# Altium PCB STM32L496RG_Breakout.PcbDoc
Units mil, origin at the board's own origin, x right, y up, seen from the top; angles counter-clockwise.
Board outline 2775 x 2320 mil, 4 copper layers (Top Layer, GND1, GND2, Bottom Layer), stack 23.756 mil thick; 57 components, 36 nets, 200 pads, 50 vias.
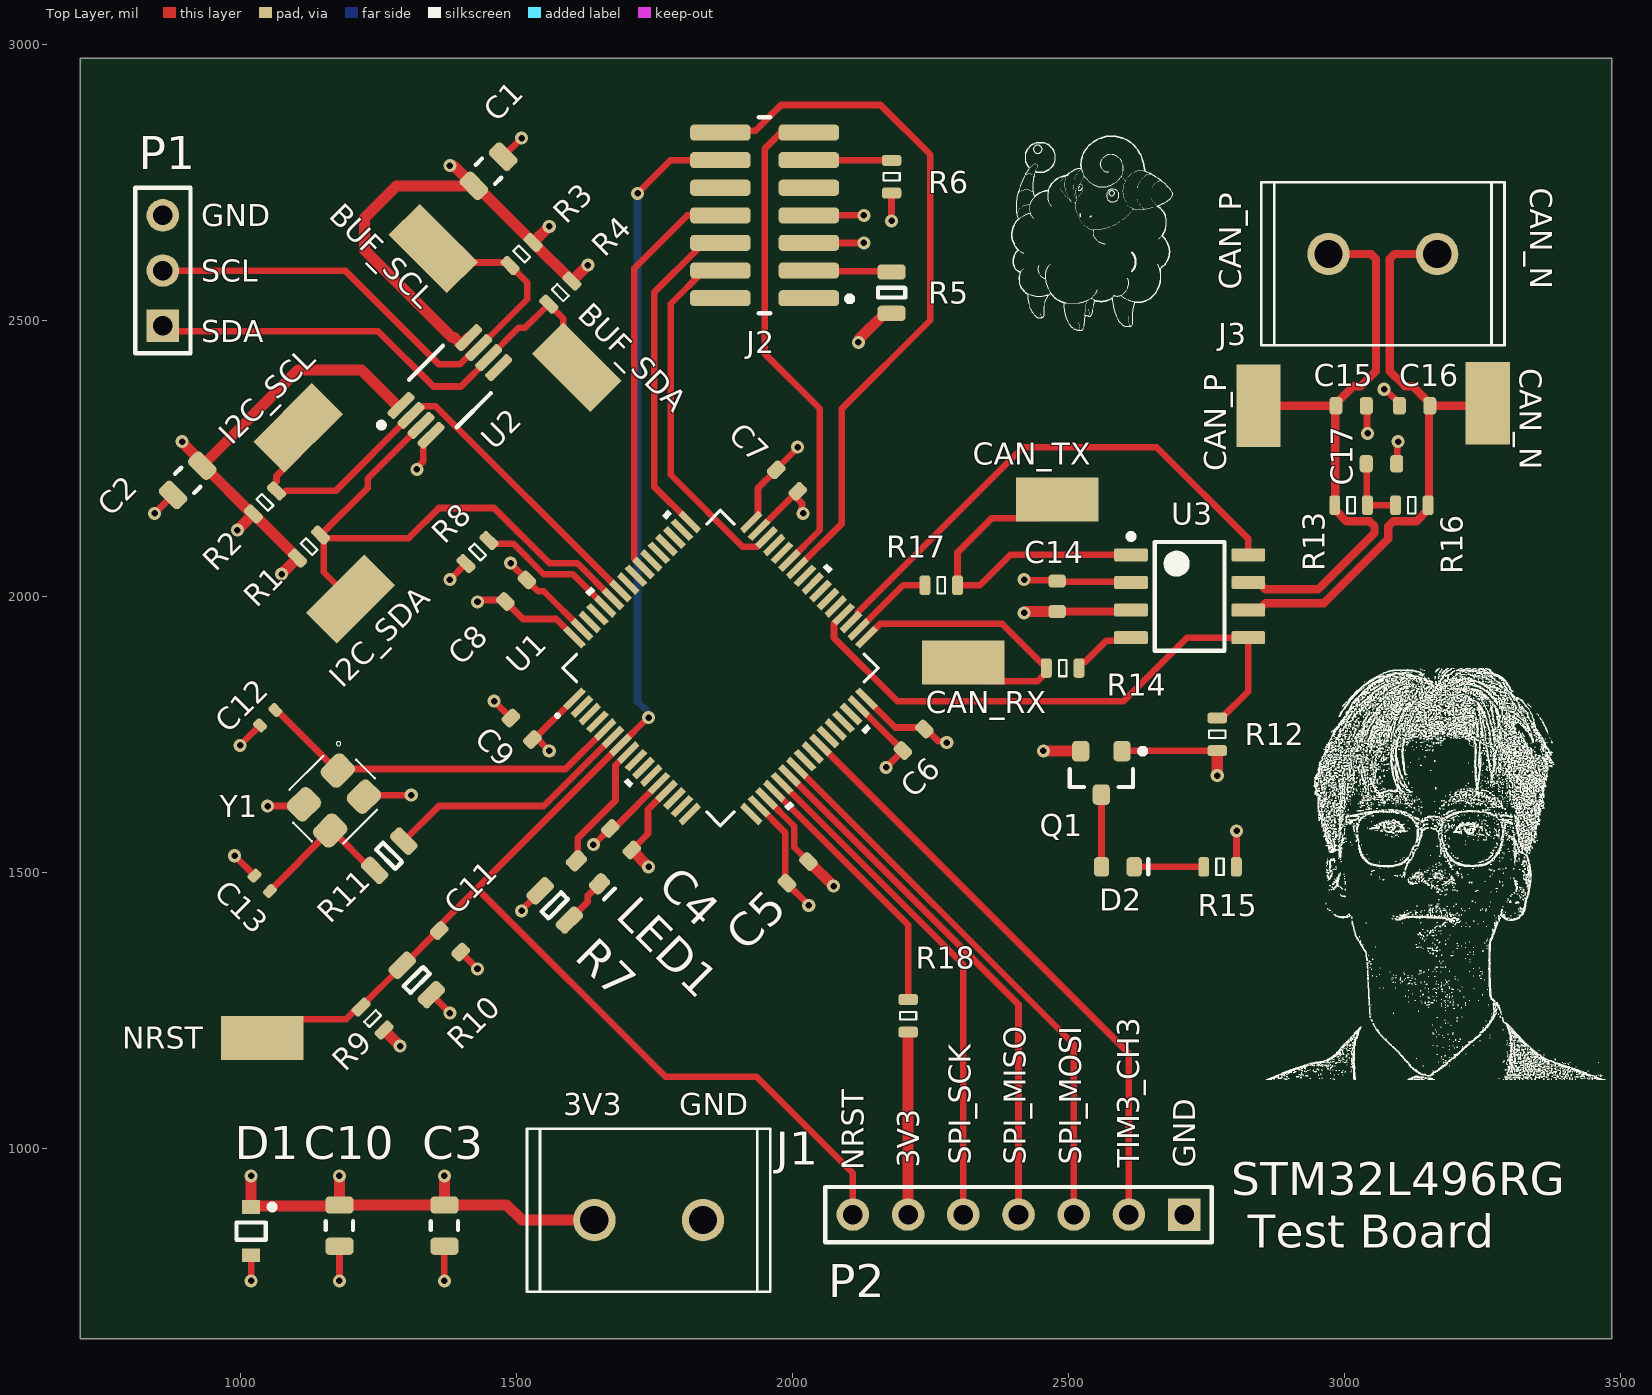
[diagram p0: Top Layer view]
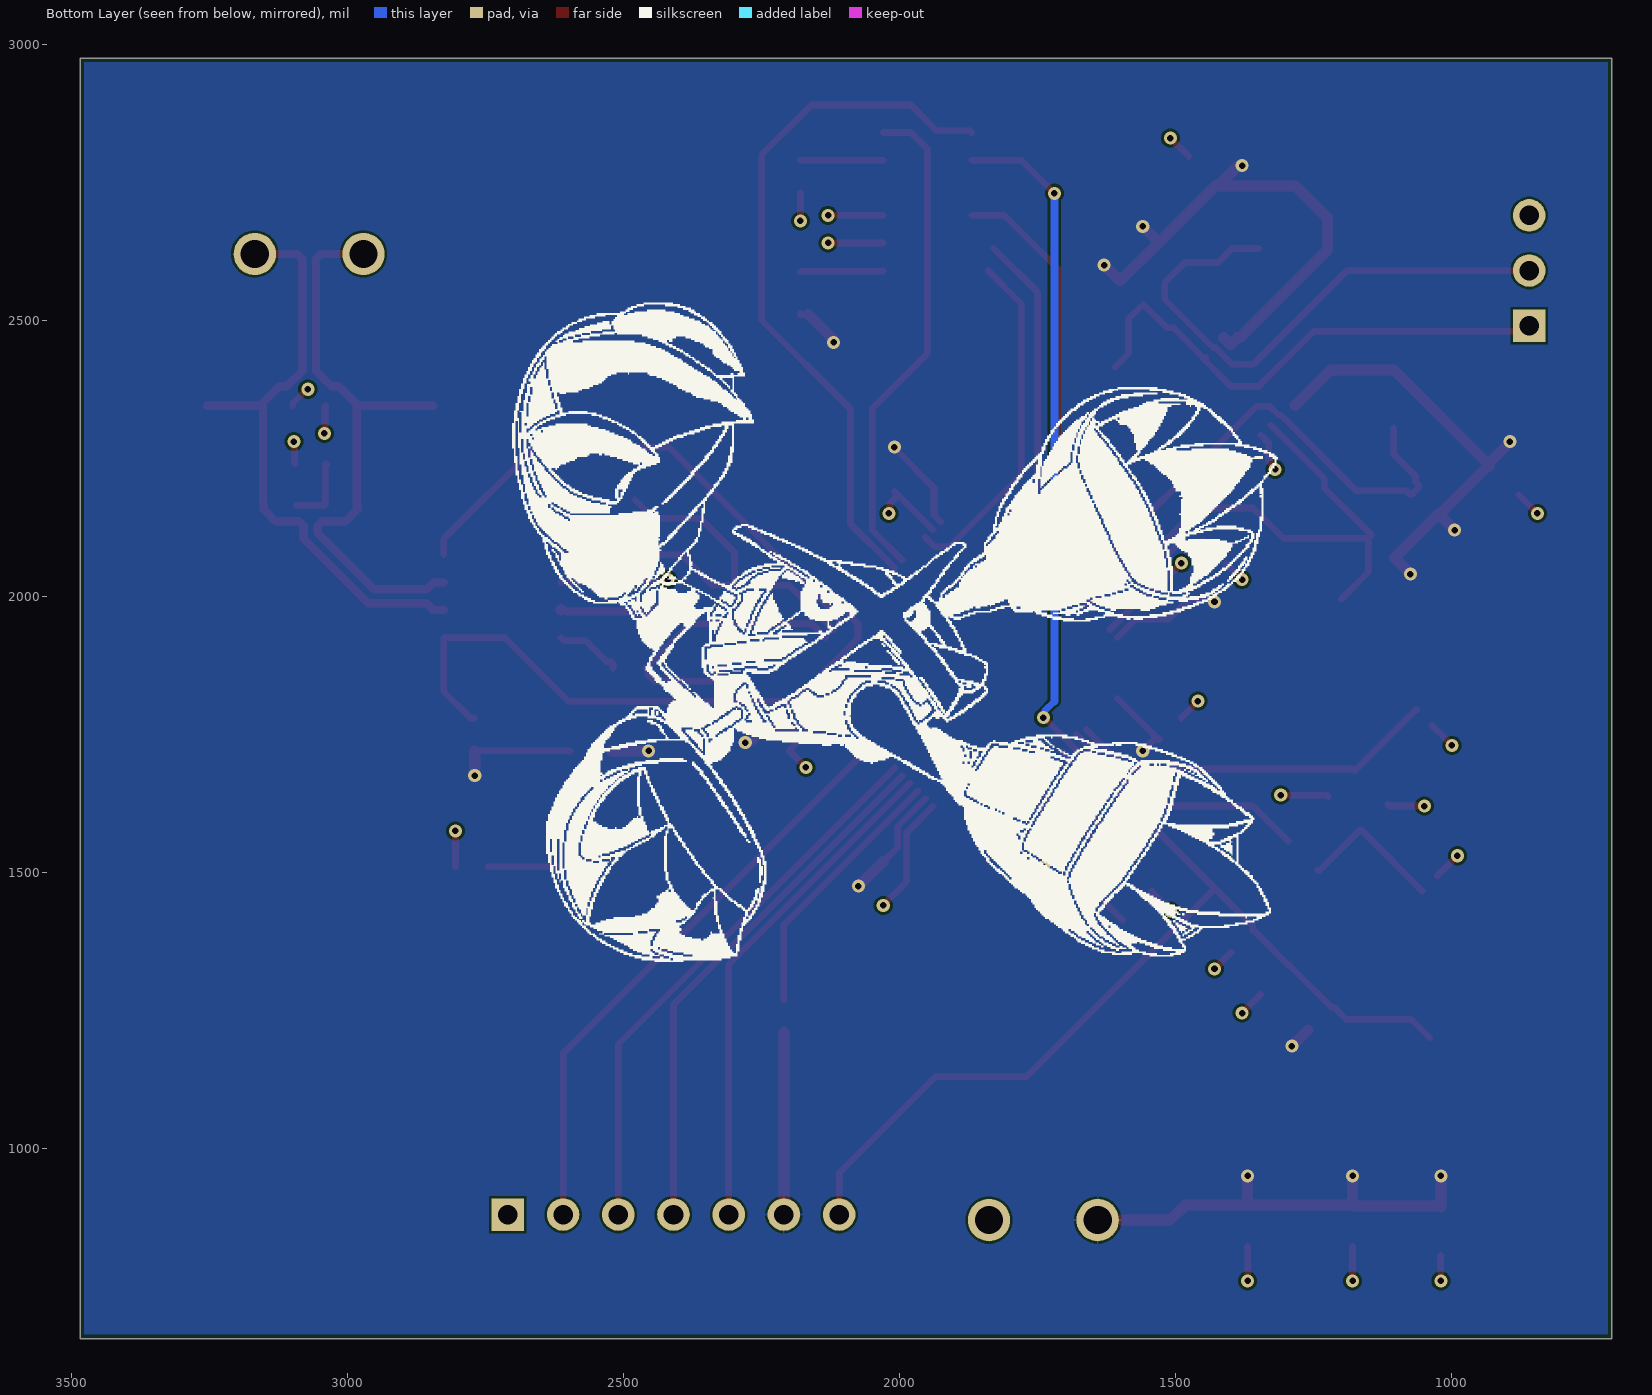
[diagram p1: Bottom Layer view, seen from below]
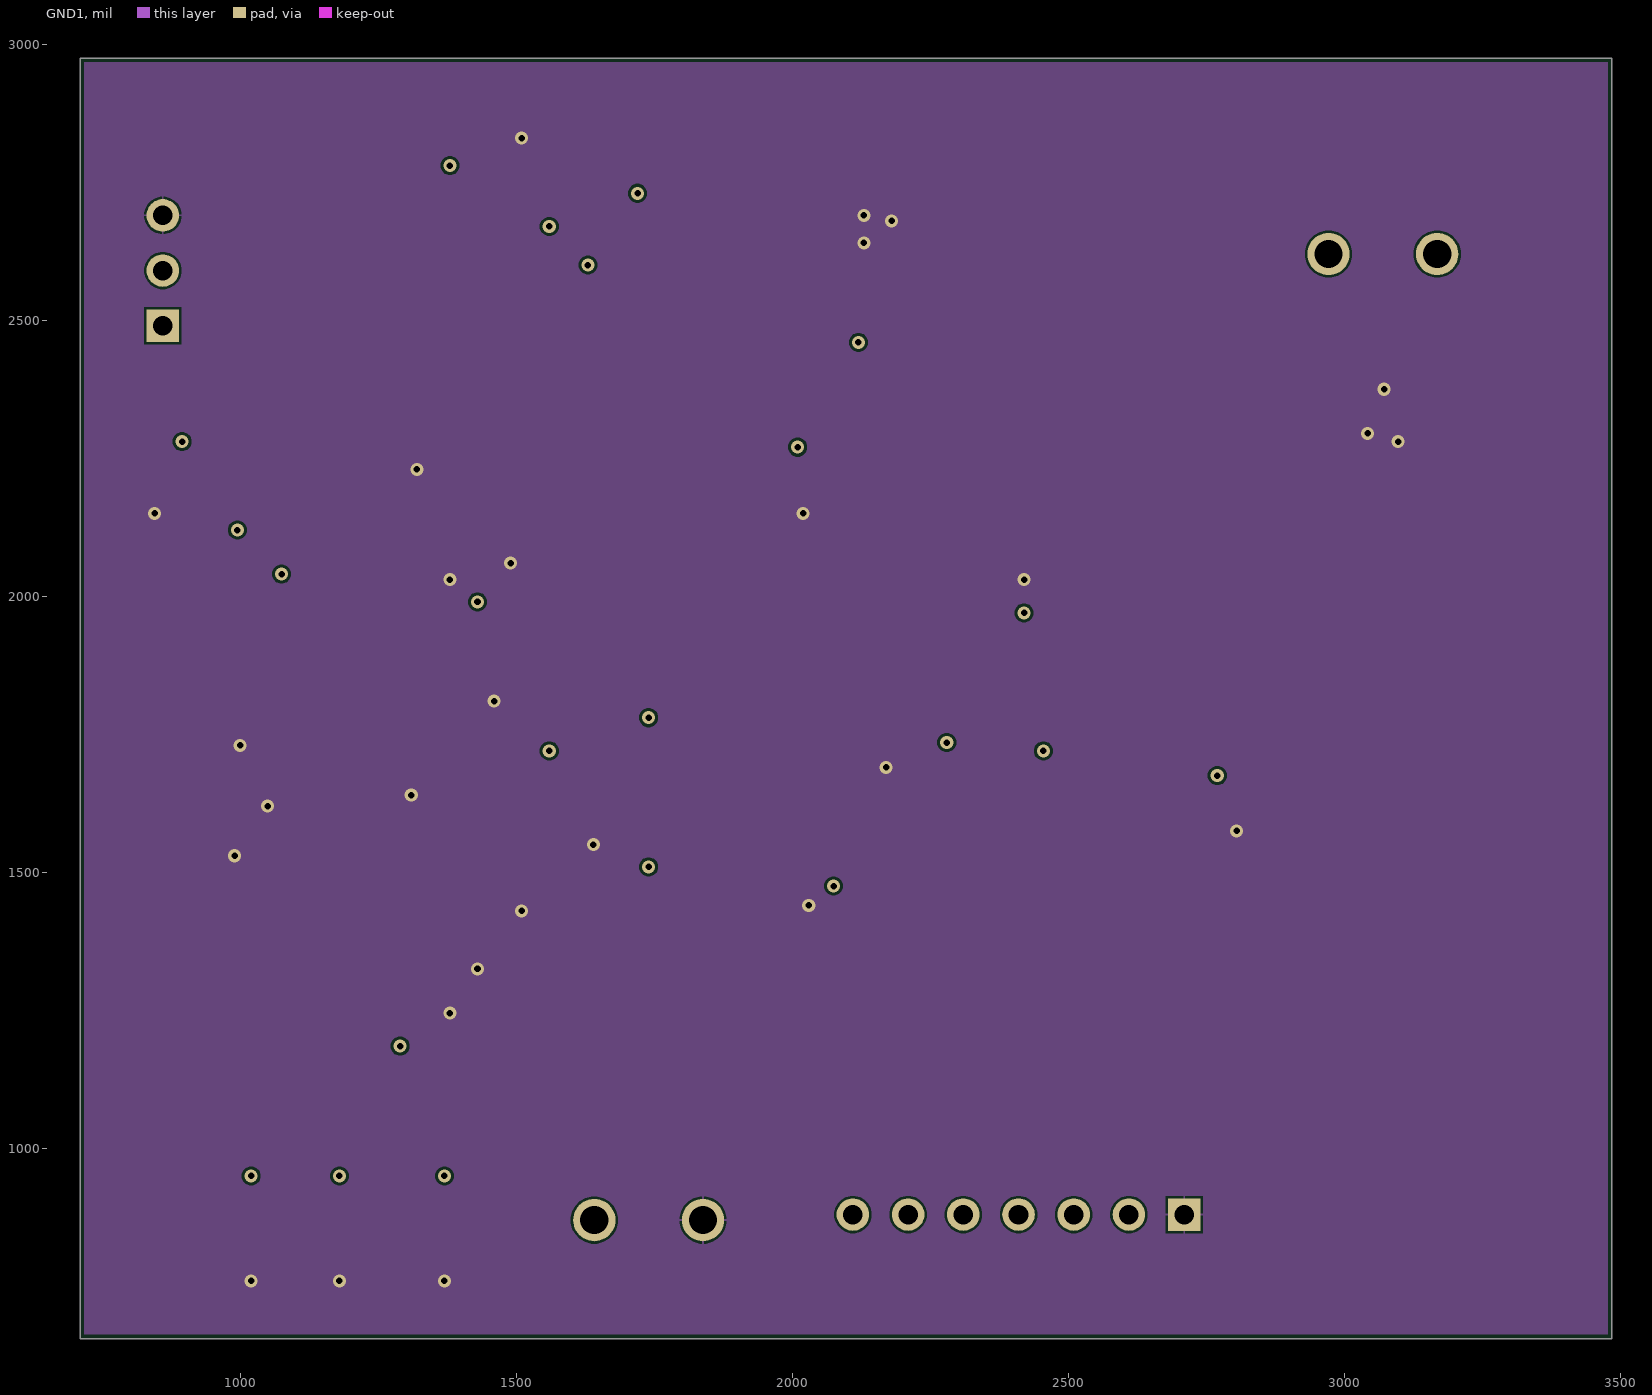
[diagram p2: GND1]
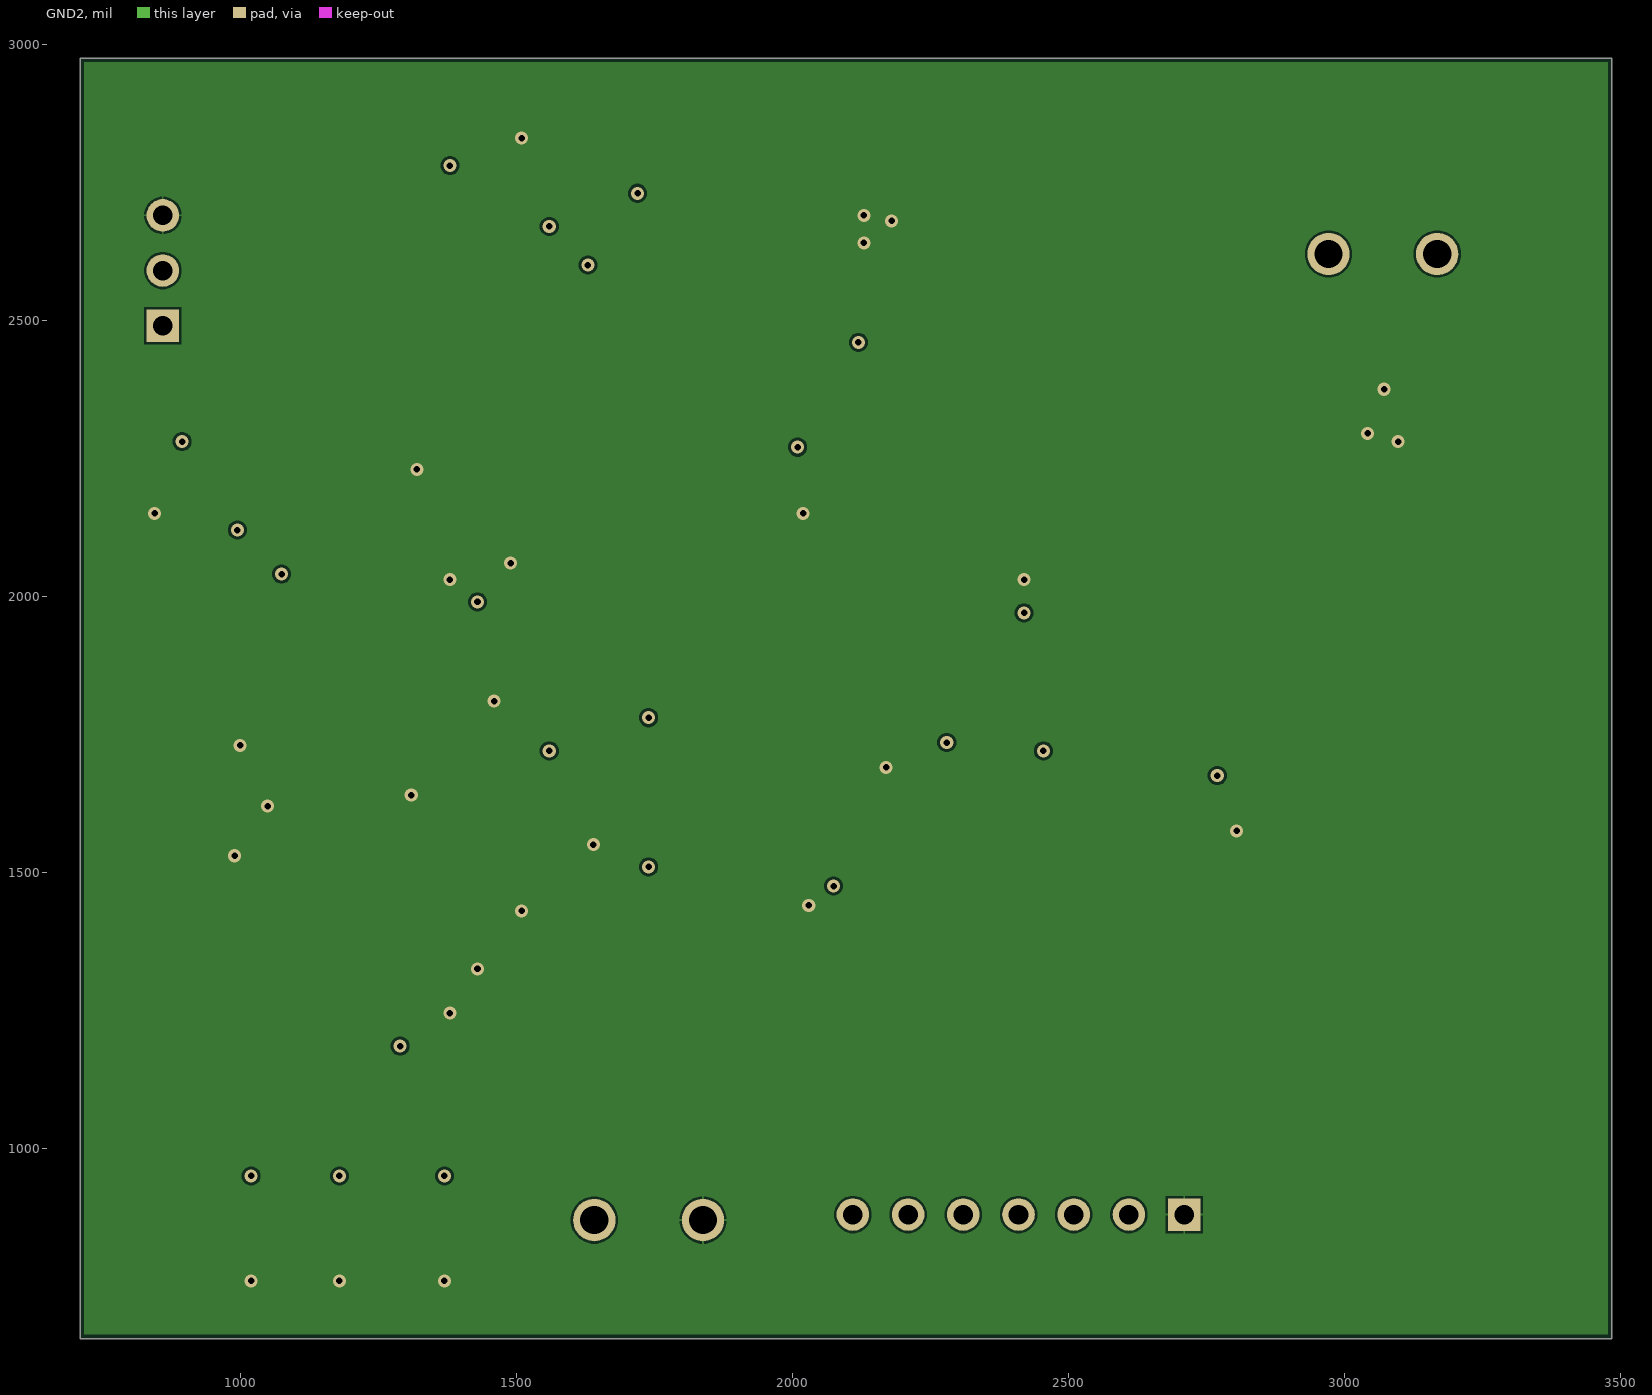
[diagram p3: GND2]
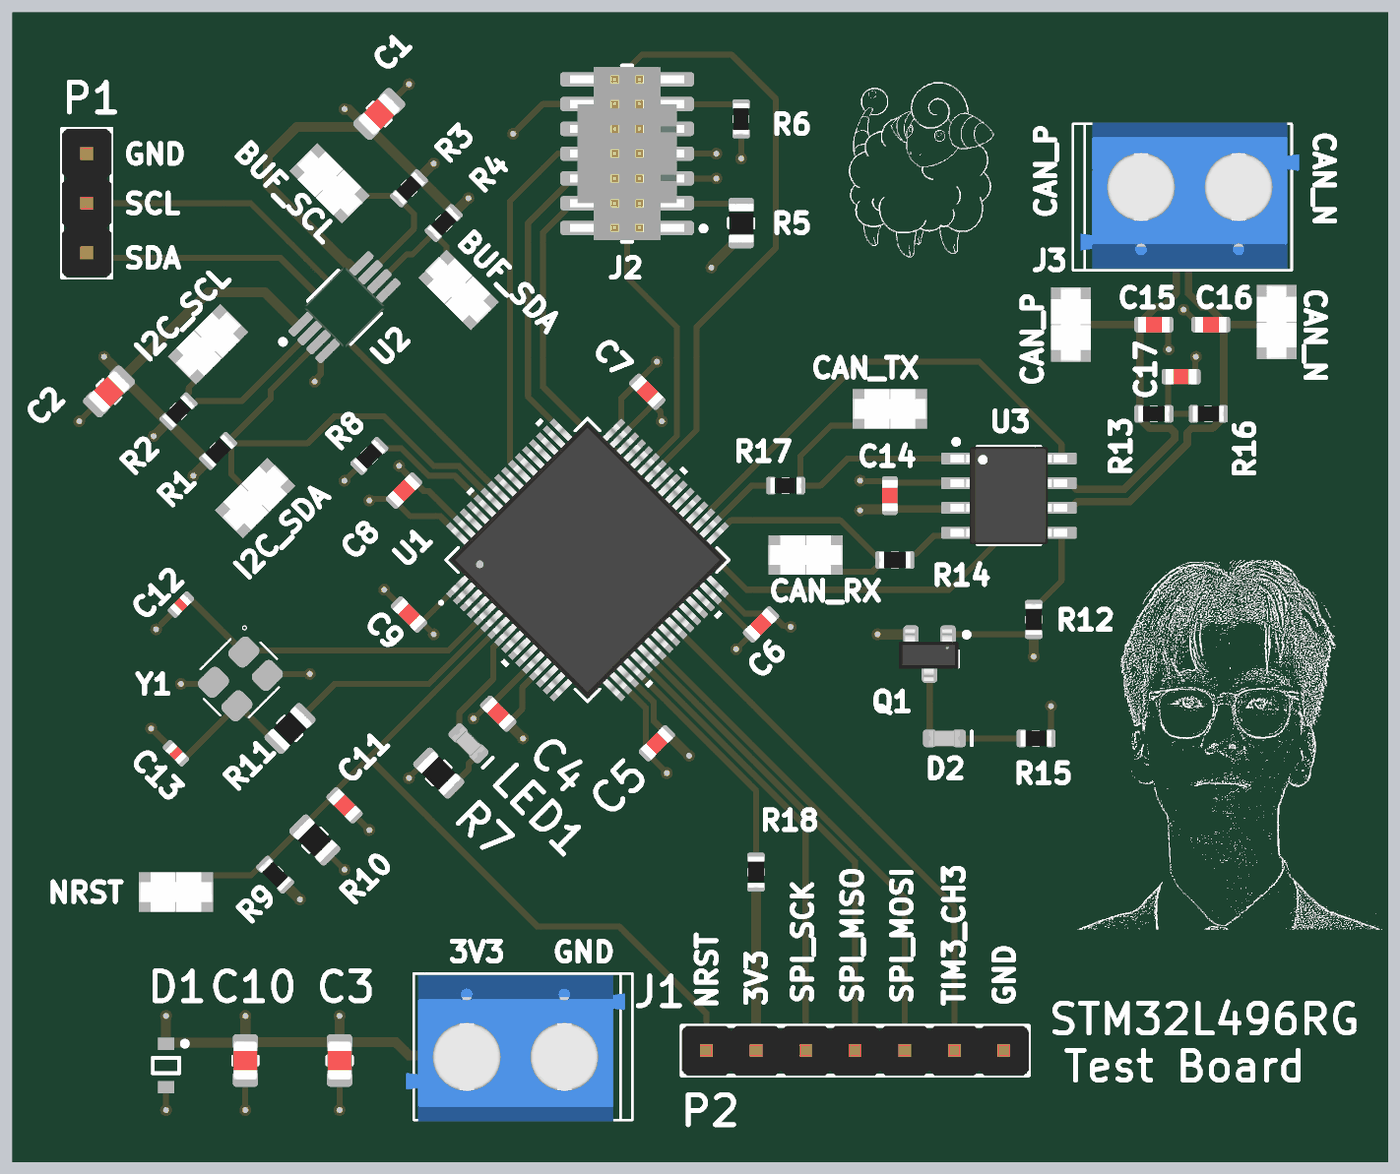
[diagram p4: 3D render of the assembled board from above, using the file's embedded part models]

## Layer stack, top to bottom
Top Solder: solder mask 0.4, Solder Resist, Dk 3.5
Top Layer: signal copper 1.4
Dielectric 2: prepreg 2.8, PP-006, Dk 4.1
GND1: signal copper 1.378
Dielectric 1: dielectric 12.6, FR-4, Dk 4.8
GND2: signal copper 1.378
Dielectric 3: prepreg 2.8, PP-006, Dk 4.1
Bottom Layer: signal copper 1.4
Bottom Solder: solder mask 0.4, Solder Resist, Dk 3.5

## Board outline
710,655 710,2975 3485,2975 3485,655

## Design rules (kind name [scope] priority, off if disabled: settings)
BoardOutlineClearance [All] p1: gap=7.87 ignorepadtopadclearanceinfootprint=FALSE
Clearance [All] p1: gap=4 ignorepadtopadclearanceinfootprint=FALSE except(5: Arc-Via Track-Via SMDPad-Via THPad-Via Via-Via Via-Fill Via-Poly Via-Region Via-Text; 9.84: Arc-Hole Track-Hole SMDPad-Hole THPad-Hole Via-Hole Fill-Hole Poly-Hole Region-Hole Text-Hole)
ComponentClearance [All] p1: gap=4 collisioncheckmode=3 verticalgap=4 showdistances=TRUE
DiffPairsRouting CANRouting [InDifferentialPair('CAN')] p1: maxlimit=5 minlimit=5 mostfreqgap=5 toplayer_minwidth=2 toplayer_maxwidth=2 toplayer_prefwidth=2 midlayer1_minwidth=0.59 midlayer1_maxwidth=0.59 midlayer1_prefwidth=0.59 midlayer2_minwidth=0.59 midlayer2_maxwidth=0.59 midlayer2_prefwidth=0.59 bottomlayer_minwidth=2 bottomlayer_maxwidth=2 bottomlayer_prefwidth=2 impedanceprofiledriven=TRUE impedanceprofileid={99A3BFF2-2C08-4B05-82E0-5BF1186CD0FB} impedanceprofilevalue=120.000000 maxuncoupledlength=500
DiffPairsRouting DiffPairsRouting_1 [All] p2: maxlimit=10 minlimit=10 mostfreqgap=10 toplayer_minwidth=15 toplayer_maxwidth=15 toplayer_prefwidth=15 midlayer1_minwidth=15 midlayer1_maxwidth=15 midlayer1_prefwidth=15 midlayer2_minwidth=15 midlayer2_maxwidth=15 midlayer2_prefwidth=15 bottomlayer_minwidth=15 bottomlayer_maxwidth=15 bottomlayer_prefwidth=15 maxuncoupledlength=500
Height [All] p1: minheight=0 maxheight=71497.94 prefheight=500
HoleSize [All] p1: absolutevalues=TRUE maxlimit=248.03 minlimit=7.87 maxpercent=80.000 minpercent=20.000
HoleToHoleClearance [All] p1: gap=9.84 allowstackedmicrovias=FALSE
MinimumAnnularRing [All] p1: minimumring=3
MinimumSolderMaskSliver [All] p1: minsoldermaskwidth=0
PlaneClearance [All] p1: clearance=4
PlaneConnect PlaneConnectPowerPads [InPadClass('PowerPads')] p1: planeconnectstyle=Direct reliefexpansion=20 reliefentries=4 reliefconductorwidth=10 reliefairgap=10
PlaneConnect [All] p2: pad.planeconnectstyle=Relief pad.reliefexpansion=11.81 pad.reliefentries=4 pad.reliefconductorwidth=4 pad.reliefairgap=4 via.planeconnectstyle=Direct via.reliefexpansion=11.81 via.reliefentries=4 via.reliefconductorwidth=5 via.reliefairgap=5
PolygonConnect PolygonConnectPowerPads [All vs (InPadClass('PowerPads'))] p1: connectstyle=Direct reliefconductorwidth=10 reliefentries=4 polygonreliefangle="90 Angle" airgapwidth=10
PolygonConnect [All] p2: thpad.connectstyle=Relief thpad.reliefconductorwidth=4 thpad.reliefentries=4 thpad.polygonreliefangle="90 Angle" thpad.airgapwidth=4 smdpad.connectstyle=Relief smdpad.reliefconductorwidth=4 smdpad.reliefentries=4 smdpad.polygonreliefangle="90 Angle" smdpad.airgapwidth=4 via.connectstyle=Direct via.reliefconductorwidth=5 via.reliefentries=4 via.polygonreliefangle="90 Angle" via.airgapwidth=5
RoutingVias [All] p1: holewidth=7.87 width=17.72 viastyle="Through Hole" minholewidth=7.87 minwidth=17.72 maxholewidth=248.03 maxwidth=257.87
SilkToSilkClearance [All] p1: silktosilkclearance=0
SilkToSolderMaskClearance [IsPad] p1: minsilkscreentomaskgap=4 clearancetoexposedcopper=TRUE
SolderMaskExpansion VIA_Tent [IsVia] p1: expansion=2.95 istentingtop=TRUE useseparateexpansions=TRUE expansionbottom=2.95 istentingbottom=TRUE
SupplyNets "Schematic Supply Nets_1" [InNet('GND')] p1: voltage=0.000
SupplyNets "Schematic Supply Nets" [InNet('3V3')] p2: voltage=0.000
Width [All] p1: maxlimit=71497.94 minlimit=4 preferedwidth=12 midlayer1_prefwidth=4 midlayer2_prefwidth=4 minimp=50.000000 maximp=50.000000 favimp=50.000000
20 further rules are at their usual default settings.

## Classes and differential pairs
differential pair CAN: +CAN_P -CAN_N

## Components (designator, comment, footprint, x,y, rotation, side; value= is the part's Value field where it differs from the comment)
BUF_SCL "5019" KSTN-5019_V 1350,2630 r135 top (schematic designator TP8)
BUF_SDA "5019" KSTN-5019_V 1610,2415 r135 top (schematic designator TP6)
C1 "LMK212B7105KGHTR" CAP0805R 1450,2770 r225 top value=1µF
C2 "LMK212B7105KGHTR" CAP0805R 905,2210 r45 top value=1µF
C3 "GCM21BR71C105KA58L" CAP0805R 1370,860 r90 top value=1µF
C4 "CGA3E2X7R1E104K080AA" CAP0603R 1690,1560 r315 top value=100nF
C5 "CGA3E2X7R1E104K080AA" CAP0603R 2010,1500 r45 top value=100nF
C6 "CGA3E2X7R1E104K080AA" CAP0603R 2220,1740 r45 top value=100nF
C7 "CGA3E2X7R1E104K080AA" CAP0603R 1990.51,2209.49 r135 top value=100nF
C8 "CGA3E2X7R1E104K080AA" CAP0603R 1500,2010 r225 top value=100nF
C9 "CGA3E2X7R1E104K080AA" CAP0603R 1510,1760 r315 top value=100nF
C10 "GCM21BR71C225KA64L" CAP0805R 1180,860 r90 top value=2.2µF
C11 "CGA3E2X7R1E104K080AA" CAP0603R 1380,1375 r135 top value=100nF
C12 "GCQ1555C1H100JB01D" CAP0402R 1050,1780 r225 top value=10pF
C13 "GCQ1555C1H100JB01D" CAP0402R 1040,1480 r135 top value=10pF
C14 "CGA3E2X7R1H104K080AE" CAP0603R 2480,2000 r270 top value=100nF
C15 "C0603C101K3GACTU" CAP0603R 3012.44,2345 r180 top value=100pF
C16 "C0603C101K3GACTU" CAP0603R 3127.44,2345 r180 top value=100pF
C17 "CGA3E2X7R1H472K080AA" CAP0603R 3067.44,2240 r180 top value=4.7nF
CAN_N "5019" KSTN-5019_V 3260,2350 r270 top (schematic designator TP4)
CAN_P "5019" KSTN-5019_V 2845,2345 r90 top (schematic designator TP1)
CAN_RX "5019" KSTN-5019_V 2310,1880 r0 top (schematic designator TP3)
CAN_TX "5019" KSTN-5019_V 2480,2175 r0 top (schematic designator TP2)
D1 "3V3" ONSC-SOD-323-2-477-02_V 1020,850 r270 top
D2 "LS Q976-NR-1" LED0603 2590,1510 r180 top
I2C_SCL "5019" KSTN-5019_V 1105,2305 r45 top (schematic designator TP7)
I2C_SDA "5019" KSTN-5019_V 1200,1995 r45 top (schematic designator TP5)
J1 "691102710002" CON2_SCREW_5.00MM_691102710002 1740,870 r0 top
J2 "FTSH-107-01-L-DV-K" FP-FTSH-107-01-L-DV-K-MFG 1950,2690 r90 top
J3 "691102710002" CON2_SCREW_5.00MM_691102710002 3070,2620 r180 top
LED1 "LT Q39E-Q1OO-25-1" LED0603 1630,1500 r135 top
NRST "5019" KSTN-5019_V 1040,1200 r0 top (schematic designator TP9)
P1 "Header 3" HDR1X3 860,2490 r90 top
P2 "Header 7" HDR1X7 2710,880 r180 top
Q1 "BC856BLT1G" ONSC-SOT-23-3-318-08_V 2560,1680 r270 top
R1 "CRCW06034K70FKEA" RES0603R 1125,2090 r225 top value=4.7k
R2 "CRCW06034K70FKEA" RES0603R 1045,2170 r225 top value=4.7k
R3 "CRCW06034K70FKEA" RES0603R 1510,2620 r45 top value=4.7k
R4 "CRCW06034K70FKEA" RES0603R 1580,2550 r45 top value=4.7k
R5 "ERJ-6GEY0R00V" RES0805R 2180,2550 r90 top value=0
R6 "ERJ-3GEYJ101V" RES0603R 2180,2760 r90 top value=100
R7 "CRCW08051K00FKTC" RES0805R 1570,1440 r315 top value=1k
R8 "ERJ-3GEYJ103V" RES0603R 1430,2080 r225 top value=10k
R9 "ERJ-3GEYJ103V" RES0603R 1240,1235 r315 top value=10k
R10 "ERJ-6GEY0R00V" RES0805R 1320,1305 r135 top value=0
R11 "ERJ-6GEY0R00V" RES0805R 1270,1530 r45 top value=0
R12 "CRCW060310K0FKEA" RES0603R 2770,1750 r270 top value=10k
R13 "CRCW060360R4FKEA" RES0603R 3012.44,2165 r180 top value=60.4
R14 "CRCW060333R0FKEA" RES0603R 2490,1870 r0 top value=33
R15 "CRCW06031K00FKEA" RES0603R 2775,1510 r180 top value=1k
R16 "CRCW060360R4FKEA" RES0603R 3122.44,2165 r180 top value=60.4
R17 "CRCW060333R0FKEA" RES0603R 2270,2020 r180 top value=33
R18 "RCG060310K0FKEA" RES0603R 2210,1240 r90 top value=10k
U1 "STM32L496RGT3" LQFP64-10x10mm 1870.08,1870.08 r45 top
U2 "TCA9517DGKRQ1" FP-DGK0008A-MFG 1380,2380 r45 top
U3 "TCAN337GDR" TI-D0008A 2720,2000 r0 top
Y1 "X322516MLB4SI" X322516MLB4SI-Footprint-1 1170,1630 r225 top

## Footprints (in the part's own frame and the unit in brackets; to place one, negate y for a bottom-side part, rotate by r counter-clockwise, add the part's x,y. Pads: shape width x height; smd on the part's side, far side on the other; paste and mask are expansions set on the pad)
CAP0402R [mm] "Capacitor 0402 reflow soldering"
  rrect50% 0.45x0.6 smd: 1(-0.5,0) 2(0.5,0)
  body extent -0.5,-0.3 0.5,0.3, height 0.2
CAP0603R [mm] "capacitor 0603 reflow soldering"
  rrect50% 0.6x0.8 smd: 1(-0.7,0) 2(0.7,0)
  body extent -0.8,-0.4 0.8,0.4, height 0.3
CAP0805R [mm] "capacitor 0805 reflow soldering"
  rrect50% 0.8x1.3 smd: 1(-0.95,0) 2(0.95,0)
  silkscreen extent -0.2,-0.62 0.2,0.62, body extent -1,-0.62 1,0.63, height 0.78
CON2_SCREW_5.00MM_691102710002 [mm] "2-Pos Screw terminal 5mm pitch"
  round 1.95 hole 1.3: 1(-2.5,0) 2(2.5,0)
  silkscreen extent -5.6,-3.3 5.6,4.2, body extent -5.98,-3.37 5.22,4.13, height 10.03
FP-DGK0008A-MFG [mm]
  rrect50% 1.45x0.45 smd: 1(-2.2,0.975) 2(-2.2,0.325) 3(-2.2,-0.325) 4(-2.2,-0.975) 5(2.2,-0.975) 6(2.2,-0.325) 7(2.2,0.325) 8(2.2,0.975)
  silkscreen extent -3.61,-1.55 1.1,1.55, body extent -3.02,-1.8 3.02,1.8, height 0.25
FP-FTSH-107-01-L-DV-K-MFG [mm]
  rrect50% 0.74x2.79 smd: 1(-3.81,-2.035) 2(-3.81,2.035) 3(-2.54,-2.035) 4(-2.54,2.035) 5(-1.27,-2.035) 6(-1.27,2.035) 7(0,-2.035) 8(0,2.035) 9(1.27,-2.035) 10(1.27,2.035) 11(2.54,-2.035) 12(2.54,2.035) 13(3.81,-2.035) 14(3.81,2.035)
  silkscreen extent -4.51,-4.04 4.51,0.27, body extent -4.61,-3.53 4.61,3.53, height 0.25
HDR1X3 [mm] "Connector; Header; 3 Position"
  rect 1.5x1.5 hole 0.9: 1(0,0)
  round 1.5 hole 0.9: 2(2.54,0) 3(5.08,0)
  silkscreen extent -1.27,-1.27 6.35,1.27, body extent -1.27,-1.27 6.35,1.27, height 8.89
HDR1X7 [mm] "Connector; Header; 7 Position"
  rect 1.5x1.5 hole 0.9: 1(0,0)
  round 1.5 hole 0.9: 2(2.54,0) 3(5.08,0) 4(7.62,0) 5(10.16,0) 6(12.7,0) 7(15.24,0)
  silkscreen extent -1.27,-1.27 16.51,1.27, body extent -1.27,-1.27 16.51,1.27, height 8.89
KSTN-5019_V [mm] "Test Point, 1-Leads, Body 3.81x2.03mm"
  rect 3.8x2.03 smd: 1(0,0)
  body extent -1.9,-1.01 1.9,1.02, height 2.29
LED0603 [mm] "0603 LED footprint, thick line on the cathode"
  rrect50% 0.7x0.9 smd: 1(-0.75,0) 2(0.75,0)
  silkscreen extent -1.4,-0.35 -1.4,0.35, body extent -0.8,-0.4 0.8,0.4, height 0.34
LQFP64-10x10mm [mil]
  rect 47x12 smd paste+0 mask+0: 1(-226.38,147.64) 2(-226.38,127.95) 3(-226.38,108.27) 4(-226.38,88.58) 5(-226.38,68.9) 6(-226.38,49.21) 7(-226.38,29.53) 8(-226.38,9.84) 9(-226.38,-9.84) 10(-226.38,-29.53) 11(-226.38,-49.21) 12(-226.38,-68.9) 13(-226.38,-88.58) 14(-226.38,-108.27) 15(-226.38,-127.95) 16(-226.38,-147.64) 33(226.38,-147.64) 34(226.38,-127.95) 35(226.38,-108.27) 36(226.38,-88.58) 37(226.38,-68.9) 38(226.38,-49.21) 39(226.38,-29.53) 40(226.38,-9.84) 41(226.38,9.84) 42(226.38,29.53) 43(226.38,49.21) 44(226.38,68.9) 45(226.38,88.58) 46(226.38,108.27) 47(226.38,127.95) 48(226.38,147.64)
  rect 12x47 smd paste+0 mask+0: 17(-147.64,-226.38) 18(-127.95,-226.38) 19(-108.27,-226.38) 20(-88.58,-226.38) 21(-68.9,-226.38) 22(-49.21,-226.38) 23(-29.53,-226.38) 24(-9.84,-226.38) 25(9.84,-226.38) 26(29.53,-226.38) 27(49.21,-226.38) 28(68.9,-226.38) 29(88.58,-226.38) 30(108.27,-226.38) 31(127.95,-226.38) 32(147.64,-226.38) 49(147.64,226.38) 50(127.95,226.38) 51(108.27,226.38) 52(88.58,226.38) 53(68.9,226.38) 54(49.21,226.38) 55(29.53,226.38) 56(9.84,226.38) 57(-9.84,226.38) 58(-29.53,226.38) 59(-49.21,226.38) 60(-68.9,226.38) 61(-88.58,226.38) 62(-108.27,226.38) 63(-127.95,226.38) 64(-147.64,226.38)
  silkscreen extent -273,-270 270,270, body extent -236,-236 236,236, height 63
ONSC-SOD-323-2-477-02_V [mm] "SOD, 2-Leads, Body 1.7x1.25mm"
  rect 0.63x0.83 smd: 1(-1.115,0) 2(1.115,0)
  silkscreen extent -1.24,-0.67 0.4,1.09, body extent -0.85,-0.63 0.85,0.63, height 1.06
ONSC-SOT-23-3-318-08_V [mm] "SOT23, 3-Leads, Body 2.92x1.3mm, Pitch 0.95mm"
  rrect50% 0.95x0.8 smd: 1(-1,0.95) 2(-1,-0.95) 3(1,0)
  silkscreen extent -1.12,-1.46 0.65,2.03, body extent -1.27,-1.57 1.37,1.48, height 1.12
RES0603R [mm] "resistor 0603 reflow soldering"
  rrect50% 0.5x0.9 smd: 1(-0.75,0) 2(0.75,0)
  silkscreen extent -0.18,-0.38 0.18,0.38, body extent -0.8,-0.4 0.8,0.4, height 0.45
RES0805R [mm] "resistor 0805 reflow soldering"
  rrect50% 0.7x1.3 smd: 1(-0.95,0) 2(0.95,0)
  silkscreen extent -0.23,-0.63 0.23,0.63, body extent -1,-0.63 1,0.62, height 0.5
TI-D0008A [mm] "Texas Instruments - SOIC - 1.75 mm max height"
  rrect25% 1.55x0.6 smd: 1(-2.7,1.905) 2(-2.7,0.635) 3(-2.7,-0.635) 4(-2.7,-1.905) 5(2.7,-1.905) 6(2.7,-0.635) 7(2.7,0.635) 8(2.7,1.905)
  silkscreen extent -2.82,-2.5 1.6,2.88, body extent -3,-2.5 3,2.5, height 1.75
X322516MLB4SI-Footprint-1 [mm]
  rrect50% 1.4x1.2 smd: 1(-1.1,-0.85) 2(1.1,-0.85) 3(1.1,0.85) 4(-1.1,0.85)
  silkscreen extent -2.1,-1.8 2.05,1.7, body extent -1.62,-1.25 1.63,1.25, height 0.7

## Part data
BUF_SCL BUF_SDA CAN_N CAN_P CAN_RX CAN_TX I2C_SCL I2C_SDA NRST: library part CMP-000000-1, "Interconnection Device"
C1 C2: library part CMP-024-001219-8, "CAP CER 1UF 10V X7R 0805", Case/Package="0805 (2012 Metric)", Manufacturer="Taiyo Yuden", Max Operating Temperature=125°C, Min Operating Temperature=-55°C, Rating=AEC-Q200, Supplier Part Number 1=587-6338-1-ND, Temperature Coefficient=X7R, Tolerance=10%, Voltage Rating=10V, ComponentLink1Description=Datasheet, ComponentLink1URL=https://www.yuden.co.jp/productdata/catalog/mlcc_all_hq_e.pdf, PN=LMK212B7105KGHTR, Supplier 1=Digi-Key
C3: library part CMP-024-000717-8, "CAP CER 1UF 16V X7R 0805", Case/Package="0805 (2012 Metric)", Manufacturer="Murata Electronics", Max Operating Temperature=125°C, Min Operating Temperature=-55°C, Rating=AEC-Q200, Supplier Part Number 1=490-14437-1-ND, Temperature Coefficient=X7R, Tolerance=10%, Voltage Rating=16V, ComponentLink1Description=Datasheet, ComponentLink1URL=https://search.murata.co.jp/Ceramy/image/img/A01X/G101/ENG/GCM21BR71C105KA58-01.pdf, PN=GCM21BR71C105KA58L, Supplier 1=Digi-Key
C4 C5 C6 C7 C8 C9 C11: library part CMP-024-000155-8, "CAP CER 0.1UF 25V X7R 0603", Case/Package="0603 (1608 Metric)", Manufacturer="TDK Corporation", Max Operating Temperature=125°C, Min Operating Temperature=-55°C, Rating=AEC-Q200, Supplier Part Number 1=445-5667-1-ND, Temperature Coefficient=X7R, Tolerance=10%, Voltage Rating=25V, ComponentLink1Description=Datasheet, ComponentLink1URL=https://product.tdk.com/info/en/catalog/datasheets/mlcc_automotive_general_en.pdf?ref_disty=digikey, PN=CGA3E2X7R1E104K080AA, Supplier 1=Digi-Key
C10: library part CMP-024-000719-8, "CAP CER 2.2UF 16V X7R 0805", Case/Package="0805 (2012 Metric)", Manufacturer="Murata Electronics", Max Operating Temperature=125°C, Min Operating Temperature=-55°C, Rating=AEC-Q200, Supplier Part Number 1=490-4786-1-ND, Temperature Coefficient=X7R, Tolerance=10%, Voltage Rating=16V, ComponentLink1Description=Datasheet, ComponentLink1URL=https://psearch.en.murata.com/capacitor/product/GCM21BR71C225KA64%23.pdf, PN=GCM21BR71C225KA64L, Supplier 1=Digi-Key
C12 C13: library part CMP-024-000761-8, "CAP CER 10PF 50V C0G/NP0 0402", Case/Package="0402 (1005 Metric)", Manufacturer="Murata Electronics", Max Operating Temperature=125°C, Min Operating Temperature=-55°C, Rating=AEC-Q200, Supplier Part Number 1=490-17423-1-ND, Temperature Coefficient="C0G, NP0", Tolerance=5%, Voltage Rating=50V, ComponentLink1Description=Datasheet, ComponentLink1URL=https://search.murata.co.jp/Ceramy/image/img/A01X/G101/ENG/GCQ1555C1H100JB01-01.pdf, PN=GCQ1555C1H100JB01D, Supplier 1=Digi-Key
C14: library part CMP-024-000175-8, "CAP CER 0.1UF 50V X7R 0603", Case/Package="0603 (1608 Metric)", Manufacturer="TDK Corporation", Max Operating Temperature=125°C, Min Operating Temperature=-55°C, Rating=AEC-Q200, Supplier Part Number 1=445-15957-1-ND, Temperature Coefficient=X7R, Tolerance=10%, Voltage Rating=50V, ComponentLink1Description=Datasheet, ComponentLink1URL=https://product.tdk.com/info/en/catalog/datasheets/mlcc_automotive_soft_en.pdf?ref_disty=digikey, PN=CGA3E2X7R1H104K080AE, Supplier 1=Digi-Key
C15 C16: library part CMP-024-000001-8, "CAP CER 100PF 25V C0G/NP0 0603", Case/Package="0603 (1608 Metric)", Manufacturer=KEMET, Max Operating Temperature=125°C, Min Operating Temperature=-55°C, Supplier Part Number 1=399-11130-1-ND, Temperature Coefficient="C0G, NP0", Tolerance=10%, Voltage Rating=25V, ComponentLink1Description=Datasheet, ComponentLink1URL=https://content.kemet.com/datasheets/KEM_C1003_C0G_SMD.pdf, PN=C0603C101K3GACTU, Supplier 1=Digi-Key
C17: library part CMP-024-000204-8, "CAP CER 4700PF 50V X7R 0603", Case/Package="0603 (1608 Metric)", Manufacturer="TDK Corporation", Max Operating Temperature=125°C, Min Operating Temperature=-55°C, Rating=AEC-Q200, Supplier Part Number 1=445-5661-1-ND, Temperature Coefficient=X7R, Tolerance=10%, Voltage Rating=50V, ComponentLink1Description=Datasheet, ComponentLink1URL=https://product.tdk.com/info/en/catalog/datasheets/mlcc_automotive_general_en.pdf?ref_disty=digikey, PN=CGA3E2X7R1H472K080AA, Supplier 1=Digi-Key
D1: library part CMP-004-00015-1, "Zener Diode, 3.3V V(Z), 6%, 0.3W, Silicon, Unidirectional", Max Operating Temperature=150°C, RoHS Compliant=Yes
D2: library part CMP-029-000016-3, "LED RED DIFFUSED 0603 SMD", Color=Red, Current - Average=20mA, Manufacturer="OSRAM Opto Semiconductors Inc.", Package="0603 (1608 Metric)", Supplier Part Number 1=475-2512-1-ND, Voltage - Forward Max=2V, ComponentLink1Description=Datasheet, ComponentLink1URL=https://dammedia.osram.info/media/resource/hires/osram-dam-2493499/LS%20Q976.pdf, PN="LS Q976-NR-1", Supplier 1=Digi-Key, TYPE=LED
J1 J3: library part CMP-027-000000-1, "2 Position Wire to Board Terminal Block Horizontal with Board 0.197\" (5.00mm) Through Hole", Manufacturer="Würth Elektronik", Supplier Part Number 1=732-2028-ND, ComponentLink1Description=Datasheet, ComponentLink1URL=https://www.we-online.de/katalog/datasheet/6911027100xx.pdf, Connector Type="Screw Terminal", Contact Type=Wire, Number of Positions=2, Number of Rows=1, Pitch - Mating="0.197\" (5.00mm)", PN=691102710002, Series="WR-TBL Series 102", Supplier 1=Digi-Key
J2: library part CMP-002-00034-3, "Conn Unshrouded Header HDR 14 POS 1.27mm Solder ST Top Entry SMD TIGER CLAW™ Tube", Current Rating=3.4A, Max Operating Temperature=125°C, Min Operating Temperature=-55°C, Contact Material=Bronze, Gender=Male, Number of Contacts=14, Number of Rows=2, Pitch=1.27mm
LED1: library part CMP-029-000017-3, "LED GREEN DIFFUSED 0603 SMD", Color=Green, Current - Average=5mA, Manufacturer="OSRAM Opto Semiconductors Inc.", Package="0603 (1608 Metric)", Supplier Part Number 1=475-3441-1-ND, Voltage - Forward Max=2.85V, ComponentLink1Description=Datasheet, ComponentLink1URL=https://dammedia.osram.info/media/resource/hires/osram-dam-2493475/LT%20Q39E.pdf, PN="LT Q39E-Q1OO-25-1", Supplier 1=Digi-Key, TYPE=LED
P1: library part CMP-083-000090-3, "Header, 3-Pin", Component Type=Standard, Design Item ID="Header 3", LatestRevisionDate=17-Jul-2002, LatestRevisionNote="Re-released for DXP Platform.", Pin Count=3, Publisher="Altium Limited", Source="Miscellaneous Connectors.SchLib"
P2: library part CMP-083-000112-2, "Header, 7-Pin", Component Type=Standard, Design Item ID="Header 7", LatestRevisionDate=17-Jul-2002, LatestRevisionNote="Re-released for DXP Platform.", Pin Count=7, Publisher="Altium Limited", Source="Miscellaneous Connectors.SchLib"
Q1: library part CMP-013-00001-2, "Small Signal Bipolar Transistor, 0.1A I(C), 65V V(BR)CEO, 1-Element, PNP, Silicon, TO-236AB"
R1 R2 R3 R4: library part CMP-054-001314-6, "RES SMD 4.7K OHM 1% 1/10W 0603", Case/Package="0603 (1608 Metric)", Manufacturer="Vishay Dale", Max Operating Temperature=155°C, Min Operating Temperature=-55°C, Power=100mW, Rating=AEC-Q200, Supplier Part Number 1=541-4.70KHCT-ND, Tolerance=1%, ComponentLink1Description=Datasheet, ComponentLink1URL=https://www.vishay.com/docs/20035/dcrcwe3.pdf, Composition="Thick Film", PN=CRCW06034K70FKEA, Supplier 1=Digi-Key
R5 R10 R11: library part CMP-054-002879-6, "RES SMD 0 OHM JUMPER 1/8W 0805", Case/Package="0805 (2012 Metric)", Manufacturer=Panasonic, Max Operating Temperature=155°C, Min Operating Temperature=-55°C, Power=125mW, Rating=AEC-Q200, Supplier Part Number 1=P0.0ACT-ND, Tolerance=0%, ComponentLink1Description=Datasheet, ComponentLink1URL=http://industrial.panasonic.com/www-cgi/jvcr13pz.cgi?E+PZ+3+AOA0001+ERJ6GEY0R00V+7+WW, Composition="Thick Film", PN=ERJ-6GEY0R00V, Supplier 1=Digi-Key
R6: library part CMP-054-002817-6, "RES SMD 100 OHM 5% 1/10W 0603", Case/Package="0603 (1608 Metric)", Manufacturer=Panasonic, Max Operating Temperature=155°C, Min Operating Temperature=-55°C, Power=100mW, Rating=AEC-Q200, Supplier Part Number 1=P100GCT-ND, Tolerance=5%, ComponentLink1Description=Datasheet, ComponentLink1URL=http://industrial.panasonic.com/www-cgi/jvcr13pz.cgi?E+PZ+3+AOA0001+ERJ3GEYJ101V+7+WW, Composition="Thick Film", PN=ERJ-3GEYJ101V, Supplier 1=Digi-Key
R7: library part CMP-054-001714-6, "RES SMD 1K OHM 1% 1/8W 0805", Case/Package="0805 (2012 Metric)", Manufacturer="Vishay Dale", Max Operating Temperature=155°C, Min Operating Temperature=-55°C, Power=125mW, Rating=AEC-Q200, Supplier Part Number 1=541-4320-1-ND, Tolerance=1%, ComponentLink1Description=Datasheet, ComponentLink1URL=https://www.vishay.com/docs/20008/dcrcw.pdf, Composition="Thick Film", PN=CRCW08051K00FKTC, Supplier 1=Digi-Key
R8 R9: library part CMP-054-002819-6, "RES SMD 10K OHM 5% 1/10W 0603", Case/Package="0603 (1608 Metric)", Manufacturer=Panasonic, Max Operating Temperature=155°C, Min Operating Temperature=-55°C, Power=100mW, Rating=AEC-Q200, Supplier Part Number 1=P10KGCT-ND, Tolerance=5%, ComponentLink1Description=Datasheet, ComponentLink1URL=http://industrial.panasonic.com/www-cgi/jvcr13pz.cgi?E+PZ+3+AOA0001+ERJ3GEYJ103V+7+WW, Composition="Thick Film", PN=ERJ-3GEYJ103V, Supplier 1=Digi-Key
R12: library part CMP-054-000780-6, "RES SMD 10K OHM 1% 1/10W 0603", Case/Package="0603 (1608 Metric)", Manufacturer="Vishay Dale", Max Operating Temperature=155°C, Min Operating Temperature=-55°C, Power=100mW, Rating=AEC-Q200, Supplier Part Number 1=541-10.0KHCT-ND, Tolerance=1%, ComponentLink1Description=Datasheet, ComponentLink1URL=https://www.vishay.com/docs/20035/dcrcwe3.pdf, Composition="Thick Film", PN=CRCW060310K0FKEA, Supplier 1=Digi-Key
R13 R16: library part CMP-054-001409-6, "RES SMD 60.4 OHM 1% 1/10W 0603", Case/Package="0603 (1608 Metric)", Manufacturer="Vishay Dale", Max Operating Temperature=155°C, Min Operating Temperature=-55°C, Power=100mW, Rating=AEC-Q200, Supplier Part Number 1=541-60.4HCT-ND, Tolerance=1%, ComponentLink1Description=Datasheet, ComponentLink1URL=https://www.vishay.com/docs/20035/dcrcwe3.pdf, Composition="Thick Film", PN=CRCW060360R4FKEA, Supplier 1=Digi-Key
R14 R17: library part CMP-054-001172-6, "RES SMD 33 OHM 1% 1/10W 0603", Case/Package="0603 (1608 Metric)", Manufacturer="Vishay Dale", Max Operating Temperature=155°C, Min Operating Temperature=-55°C, Power=100mW, Rating=AEC-Q200, Supplier Part Number 1=541-33.0HCT-ND, Tolerance=1%, ComponentLink1Description=Datasheet, ComponentLink1URL=https://www.vishay.com/docs/20035/dcrcwe3.pdf, Composition="Thick Film", PN=CRCW060333R0FKEA, Supplier 1=Digi-Key
R15: library part CMP-054-000905-6, "RES SMD 1K OHM 1% 1/10W 0603", Case/Package="0603 (1608 Metric)", Manufacturer="Vishay Dale", Max Operating Temperature=155°C, Min Operating Temperature=-55°C, Power=100mW, Rating=AEC-Q200, Supplier Part Number 1=541-1.00KHCT-ND, Tolerance=1%, ComponentLink1Description=Datasheet, ComponentLink1URL=https://www.vishay.com/docs/20035/dcrcwe3.pdf, Composition="Thick Film", PN=CRCW06031K00FKEA, Supplier 1=Digi-Key
R18: library part CMP-054-002885-6, "RES SMD 10K OHM 1% 1/10W 0603", Case/Package="0603 (1608 Metric)", Manufacturer="Vishay Dale", Max Operating Temperature=155°C, Min Operating Temperature=-55°C, Power=100mW, Rating=AEC-Q200, Supplier Part Number 1=541-1784-2-ND, Tolerance=1%, ComponentLink1Description=Datasheet, ComponentLink1URL=https://www.vishay.com/docs/20047/rcge3.pdf, Composition="Thick Film", PN=RCG060310K0FKEA, Supplier 1=Digi-Key
U1: "Ultra-low-power with FPU Arm Cortex-M4 MCU 80 MHz with 1 Mbyte of Flash memory, USB OTG, LCD, DFSDM", Manufacturer_Name=STMicroelectronics, Copyright="Copyright (C) 2025 Ultra Librarian. All rights reserved.", Manufacturer_Part_Number=STM32L496RGT3, RefDes=RefDes, TYPE=Type
U2: library part CMP-015-00008-5, "Voltage Level Translator Bidirectional 1 Circuit 2 Channel 8-VSSOP", Case/Package=VSSOP, Frequency=400kHz, Max Operating Temperature=125°C, Min Operating Temperature=-40°C, Channel Type=Bidirectional
U3: library part CMP-046-000003-9, "Interface Circuit, PDSO8", Manufacturer="Texas Instruments", Max Operating Temperature=125°C, Min Operating Temperature=-40°C, Package=8-SOIC, Supplier Part Number 1=296-44213-2-ND, Voltage - Supply="3V ~ 3.6V", ComponentLink1Description=Datasheet, ComponentLink1URL=https://www.ti.com/lit/ds/symlink/tcan337.pdf?HQS=TI-null-null-digikeymode-df-pf-null-wwe&ts=1598102384823, Data Rate=5Mbps, Duplex=-, Number of Drivers/Receivers=1/1, PN=TCAN337GDR, Protocol=CANFD, Supplier 1=Digi-Key, TYPE=Transceiver
Y1: library part CMP-003-00003-2, "16MHz Surface Mount Crystal 9pF ±10ppm ±20ppm SMD3225-4P Crystals ROHS", Frequency=16MHz

## Via types
v1: diameter 23.62, hole 11.81, Top Layer to Bottom Layer, tented both sides, 49 vias
v2: diameter 23.62/23.62/23.62/23.62 (per signal layer), hole 11.81, Top Layer to Bottom Layer, tented both sides, 1 vias

## Nets (pads, with @x,y where several pads share a name; then routed paths per layer and width w, separated by ;. In a path a pad name is that pad's centre, name@x,y a point inside that pad or via, vN(x,y) a via of type N, cw(c..) or ccw(c..) an arc to the next point about the centre after c; other vN are vias at no path point)
3V3: C1.2 C2.2 C3.2 C4.2 C5.2 C6.2 C7.2 C8.2 C9.2 C10.2 C14.2 D1.1 J1.1 P2.6 Q1.1 Q1.2 R1.2 R2.2 R3.2 R4.2 R5.1 R9.2 R12.2 R18.1 U1.1 U1.13 U1.19 U1.32 U1.48 U1.64 U2.1 U2.8 U3.3 | length 4579.7
  Top Layer w12: v1(1430,1990) 1433.14,1990 1436.44,1993.3 1477.73,1993.3 C8.2 1512.16,1958.86 1572.5,1958.86 U1.64 ; v1(1560,1720) 1538.6,1741.4 C9.2@1532.61,1741.4 ; U1.1 C9.2@1532.61,1741.4 ; C4.2 1738.86,1569.88 1738.86,1613.58 U1.13 ; U1.48 1930.6,2139.4 1938.13,2146.92 1938.13,2196.08 C7.2 1971.03,2230 2010,2268.97 v1(2010,2270) ; U1.19 2003.73,1583.32 2003.73,1545.25 C5.2 ; v1(2120,2460) 2122.22,2462.22 v1@2122.22,2466.63 ; U1.32 2186.68,1762.27 2236.7,1762.27 C6.2 2242.69,1759.49 2264.95,1737.22 2277.78,1737.22 v1(2280,1735) ; R5.1@2165.59,2510 2180,2510 R5.1 ; v1(2455,1720) v1@2455.31,1719.69 ; Q1.2@2522.28,1719.69 Q1.2 ; Q1.1 2599.37,1719.37 2600,1720 2600.08,1719.92 2769.45,1719.92 R12.2@2769.72,1720.2 ; R12.2@2770,1719.92 R12.2@2769.72,1720.2 ; R12.2 R12.2@2769.72,1720.2 ; C9.2@1532.61,1741.4 1531.72,1740.51 C9.2 1530.38,1741.4 C9.2@1532.61,1741.4
  Top Layer w15: C14.2 U3.3@2602.44,1972.44
  Top Layer w20: v1(895,2280) 895,2279.02 931.45,2242.57 C2.2 ; v1(995,2120) R2.2 ; v1(1020,950) D1.1 1021.75,895.65 1178.25,895.65 C10.2 ; v1(1075,2040) R1.2 R2.2 ; v1(1180,950) C10.2 ; R9.2 v1(1290,1185) ; U2.1@1284.1,2345.9 1220,2410 1105,2410 C2.2 ; v1(1370,950) C3.2 ; v1(1380,2780) 1380.69,2779.31 1387.8,2779.31 C1.2 ; U2.8 1401.8,2456.08 1400.18,2456.08 1387.88,2468.39 1383.48,2468.39 1225,2626.87 1225,2685 1283.55,2743.55 C1.2 ; v1(1560,2670) R3.2 ; v1(1630,2600) R4.2 R3.2 ; J1.1 1510.23,870 1482.83,897.4 C3.2 ; C4.2 v1(1740,1510) ; C5.2 2030,1519.49 2074.49,1475 v1(2075,1475) ; v1@2122.22,2466.63 R5.1@2165.59,2510 ; P2.6 R18.1 ; v1(2420,1970) 2420.98,1970 2423.42,1972.44 C14.2 ; v1@2455.31,1719.69 Q1.2@2522.28,1719.69 ; U3.3 U3.3@2613.7,1976.3 ; v1(2770,1675) R12.2@2770,1719.92 ; C2.2 934.12,2236.45 1021.45,2149.12 R2.2 ; C10.2 C3.2 ; C1.2 1427.98,2743.55 1530.66,2640.88 R3.2
BOOT0: R8.1 U1.60 | length 259.9
  Top Layer w12: R8.1 1456.45,2095.31 1494.69,2095.31 1550,2040 1602.72,2040 U1.60
BUF_SCL: BUF_SCL.1 P1.2 R3.1 U2.7 | length 1005.1
  Top Layer w12: P1.2 1190,2590 1360,2420 1397.86,2420 1428.16,2450.29 U2.7 1520,2538.1 1520,2568.24 R3.1 1483.55,2604.69 1423.34,2604.69 1398.03,2630 BUF_SCL.1
BUF_SDA: BUF_SDA.1 P1.1 R4.1 U2.6 | length 954.7
  Top Layer w12: P1.1 870,2480 1250,2480 1350,2380 1400,2380 1450.29,2430.29 U2.6 ; U2.6@1446.25,2432.2 U2.6 ; R4.1@1564.69,2523.55 R4.1 ; BUF_SDA.1 1585.36,2439.64 1585.36,2502.88 R4.1 ; U2.6 1504.36,2486.26 1516.26,2486.26 R4.1
CAN_FAULT: R12.1 U1.36 U3.5 | length 1068.8
  Top Layer w12: U1.36 2075.85,1950.58 2075.85,1924.67 2190.52,1810 2600,1810 2715,1925 U3.5 2826.3,1827.95 2777.87,1779.53 R12.1
CAN_N: C16.1 CAN_N.1 J3.1 R16.1 U3.6 | length 1104.4
  Top Layer w2: CAN_N.1@3255,2345 CAN_N.1
  Top Layer w15: U3.6 2845,1975 2857.5,1987.5 2963.23,1987.5 3079.94,2104.21 3079.94,2127 3088.73,2135.78 3130.63,2135.78 3151.97,2157.13 R16.1 3153.48,2166.52 3153.48,2343.48 C16.1 ; J3.1 3091.29,2620 3082.5,2611.21 3082.5,2511.83 3082.44,2511.77 3082.44,2408.1 3109.87,2380.67 3123.26,2380.67 3155,2348.94 C16.1 ; CAN_N.1@3255,2345 C16.1
CAN_P: C15.2 CAN_P.1 J3.2 R13.2 U3.7 | length 1094.7
  Top Layer w2: C15.2@2982.91,2345 C15.2@2983.9,2344.02
  Top Layer w15: U3.7 2845,2025 2857.5,2012.5 2952.87,2012.5 3054.94,2114.57 3054.94,2127 3046.15,2135.78 3004.26,2135.78 2982.91,2157.13 R13.2 2983.9,2165.98 2983.9,2344.02 C15.2 2984.88,2348.94 3016.62,2380.67 3030.02,2380.67 3057.44,2408.1 3057.44,2522.13 3057.5,2522.19 3057.5,2611.21 3048.71,2620 J3.2 ; CAN_P.1 C15.2@2982.91,2345
CAN_RX: CAN_RX.1 R14.1 U1.33 | length 562.6
  Top Layer w12: U1.33 2158.79,1950 2380.47,1950 R14.1@2460,1870.47 ; R14.1 R14.1@2460,1870.47 ; CAN_RX.1@2320,1870 2343.96,1846.04 2444.39,1846.04 2456.63,1858.28 2456.63,1867.1 R14.1@2460,1870.47 ; CAN_RX.1@2320,1870 CAN_RX.1 CAN_RX.1@2320,1870
CAN_SILENT: U1.35 U3.8 | length 951.3
  Top Layer w12: U1.35 2119.08,1965.97 2119.08,1971.18 2417.9,2270 2660,2270 2826.3,2103.7 U3.8
CAN_TX: CAN_TX.1 R17.1 U3.1 | length 616.5
  Top Layer w12: CAN_TX.1 2446.04,2141.04 2361.04,2141.04 2299.53,2079.53 R17.1 2340,2020 2395,2075 U3.1
GND: C1.1 C2.1 C3.1 C4.1 C5.1 C6.1 C7.1 C8.1 C9.1 C10.1 C11.1 C12.2 C13.2 C14.1 C15.1 C16.2 C17.1 D1.2 J1.2 J2.5 J2.7 P1.3 P2.1 R6.1 R7.1 R8.2 R10.1 R15.1 U1.12 U1.18 U1.31 U1.47 U1.63 U2.4 U3.2 Y1.2 Y1.4 | length 2310.6
  Top Layer w12: v1(845,2150) C2.1 ; v1(990,1530) C13.2 ; 1010,1740 C12.2 ; v1(1020,760) D1.2 ; v1(1050,1620) 1050.13,1620.13 1112.8,1620.13 Y1.2 ; v1(1180,760) C10.1 ; Y1.4 1227.2,1639.87 1309.87,1639.87 v1(1310,1640) ; v1(1320,2230) 1320,2233.14 1331.98,2245.12 1331.98,2277.69 U2.4 ; R10.1 v1(1380,1245) ; v1(1370,760) C3.1 ; v1(1380,2030) R8.2 ; C11.1 v1(1430,1325) ; v1(1460,1810) C9.1 ; C1.1 v1(1510,2830) ; v1(1490,2060) 1490,2059.49 1519.49,2030 C8.1 1539.77,2009.21 1550,2009.21 U1.63 ; v1(1510,1430) 1510,1431.45 1543.55,1465 R7.1 ; v1(1640,1550) 1640.51,1550 1670,1579.49 C4.1 ; C4.1@1679.71,1582.27 U1.12 ; U1.18 1987.73,1571.48 1987.73,1483.3 C5.1 1990.51,1480 2030,1440.51 v1(2030,1440) ; U1.47 C7.1@2009.05,2190 ; C7.1@2007.22,2188.17 2007.22,2179 2017.78,2168.44 2017.78,2152.22 v1(2020,2150) ; J2.5 v1(2130,2640) ; J2.7 v1(2130,2690) ; U1.31 2163.31,1757.8 2163.31,1757.71 C6.1 v1(2170,1690) ; v1(2180,2680) R6.1 ; v1(2420,2030) 2421.22,2028.78 2478.78,2028.78 C14.1 2481.28,2026.28 2612.42,2026.28 U3.2 ; R15.1 2804.76,1510.24 2804.76,1574.76 v1(2805,1575) ; C15.1 3041.22,2343.78 3041.22,2296.22 v1(3042.44,2295) ; v1(3072.44,2375) 3073.82,2375 3099.88,2348.94 C16.2 ; C17.1 3096.22,2241.22 3096.22,2278.78 v1(3097.44,2280)
  Top Layer w15: C4.1 1673.3,1582.27 C4.1@1679.71,1582.27
  other v1: 1000,1730
I2C_SCL: I2C_SCL.1 R2.1 U1.58 U2.2 | length 965.1
  Top Layer w12: I2C_SCL.1 1105,2256.97 1065.88,2217.85 1065.88,2207.45 1060.31,2201.88 1060.31,2196.45 R2.1 1071.45,2185.31 1076.88,2185.31 1082.45,2190.88 1172.78,2190.88 U2.2 1313.75,2327.8 1330.27,2344.32 1354.08,2344.32 U1.58
I2C_SDA: I2C_SDA.1 R1.1 U1.59 U2.3 | length 1035
  Top Layer w12: I2C_SDA.1 1151.45,2043.55 R1.1@1151.45,2105.31 ; U2.3 1231.24,2213.14 1231.24,2196.24 R1.1 ; U1.59 1610.56,2060 1560,2060 1460,2160 1360,2160 1305.31,2105.31 R1.1@1151.45,2105.31 ; R1.1 R1.1@1151.45,2105.31 ; R1.1 R1.1@1151.45,2105.31
NetC13_1: C13.1 R11.1 Y1.3 | length 265.2
  Top Layer w12: C13.1 1053.92,1466.34 1163.04,1575.46 Y1.3 1167.22,1575.71 1239.38,1503.55 R11.1
NetC17_2: C17.2 R13.1 R16.2 | length 128.9
  Top Layer w12: C17.2@3038.43,2238.54 C17.2 3040.93,2238.96 3040.93,2166.04 R13.1 R16.2
NetD2_1: D2.1 R15.2 | length 125.9
  Top Layer w12: D2.1 R15.2
NetD2_2: D2.2 Q1.3 | length 130.8
  Top Layer w12: Q1.3 2560.24,1640.39 2560.24,1510.24 D2.2
NetJ2_3: J2.3 R5.2 | length 151
  Top Layer w12: J2.3 2031.42,2588.7 2178.7,2588.7 R5.2
NetJ2_11: J2.11 R6.2 | length 150.1
  Top Layer w12: J2.11 2030.35,2789.76 2179.76,2789.76 R6.2
NetLED1_1: LED1.1 R7.2 | length 88.1
  Top Layer w12: R7.2 1630,1447.11 1630,1458.24 LED1.1
NetLED1_2: LED1.2 U1.8 | length 235
  Top Layer w12: LED1.2 1611.9,1523.66 1611.9,1561.9 1680,1630 1680,1693.92 U1.8
NetR14_2: R14.2 U3.4 | length 121.6
  Top Layer w12: R14.2 2519.53,1877.87 2523.37,1881.72 2531.24,1881.72 2568.72,1919.19 2607.89,1919.19 U3.4
NetR17_2: R17.2 U1.34 | length 153.1
  Top Layer w12: U1.34 2200.95,2020 R17.2
NRST: C11.2 J2.12 NRST.1 P2.7 R9.1 R10.2 U1.7 | length 3052.2
  Top Layer w12: NRST.1 1073.96,1233.96 1191.77,1233.96 1213.69,1255.88 R9.1 1219.12,1256.45 1293.55,1330.88 R10.2 1295.51,1331.45 1358.55,1394.49 C11.2 1360.51,1402.27 1429.12,1470.88 ; v2(1720,2730) 1780,2790 J2.12 ; v1(1740,1780) 1738.24,1780 U1.7 1429.12,1470.88 ; P2.7 2105,885 2110,890 2110,955 1935,1130 1770,1130 1429.12,1470.88
  Bottom Layer w12: 1720,1810 1737.78,1792.22 1737.78,1782.22 v1(1740,1780)
  Bottom Layer w15: 1720,1810 v2(1720,2730)
RCC_OSC_IN: C12.1 U1.5 Y1.1 | length 669.7
  Top Layer w12: C12.1 1065.62,1793.92 1175.26,1684.29 Y1.1 ; Y1.1@1179.74,1687.07 1589.63,1687.07 U1.5
RCC_OSC_OUT: R11.2 U1.6 | length 471.1
  Top Layer w12: R11.2 1360,1620 1550,1620 1675.01,1745.01 1680,1750 1680.2,1749.8 U1.6
SPI_MISO: P2.4 U1.22 | length 967
  Top Layer w12: U1.22 2410,1260.56 P2.4
SPI_MOSI: P2.3 U1.23 | length 1016.5
  Top Layer w12: U1.23 2510,1188.4 P2.3
SPI_NSS: R18.2 U1.20 | length 478.3
  Top Layer w12: U1.20 2210,1404.89 R18.2
SPI_SCK: P2.5 U1.21 | length 917.4
  Top Layer w12: U1.21 2310,1332.72 P2.5
SYS_JTCK-SWCLK: J2.6 U1.49 | length 555.3
  Top Layer w12: U1.49 1750,2198.95 1750,2550 J2.6@1830,2630
SYS_JTDO-SWO: J2.8 U1.55 | length 745.7
  Top Layer w12: U1.55 1713.95,2067.97 1713.95,2593.95 1810,2690 J2.8
SYS_JTMS-SWDIO: J2.4 U1.46 | length 629.4
  Top Layer w12: J2.4@1840,2590 1780,2530 1780,2220 1910.23,2089.77 1936.66,2089.77 U1.46
TIM3_CH3: P2.2 U1.26 | length 1082.4
  Top Layer w12: U1.26 2610,1171.92 P2.2
USART_RX: J2.13 U1.43 | length 901.6
  Top Layer w12: U1.43 2050,2119.6 2050,2340 1950,2440 1950,2810 1980,2840 J2.13
USART_TX: J2.14 U1.42 | length 1286.8
  Top Layer w12: J2.14 1873.16,2843.28 1933.28,2843.28 1980,2890 2160,2890 2250,2800 2250,2500 2090,2340 2090,2131.76 U1.42
pads on no net: J2.1 J2.2 J2.9 J2.10 U1.2 U1.3 U1.4 U1.9 U1.10 U1.11 U1.14 U1.15 U1.16 U1.17 U1.24 U1.25 U1.27 U1.28 U1.29 U1.30 U1.37 U1.38 U1.39 U1.40 U1.41 U1.44 U1.45 U1.50 U1.51 U1.52 U1.53 U1.54 U1.56 U1.57 U1.61 U1.62 U2.5

## Polygon pours and split planes (outlines as drawn)
GND on GND1 "Ground1" (solid, pour order 0): 710,655 3485,655 3485,2975 710,2975
GND on GND2 "Ground2" (solid, pour order 3): 710,655 3485,655 3485,2975 710,2975
3V3 on Bottom Layer "Power Plane" (solid, pour order 4): 710,655 3485,655 3485,2975 710,2975

## Silkscreen, mask and mechanical layers (free items; w line width, h text height)
Top Overlay:
  drawing of 3203 lines, arcs and shapes, not listed
  text "CAN_N" at 3336.66,2740 h40 r270
  text "GND" at 930,2670 h40
  text "SCL" at 930,2570 h40
  text "CAN_P" at 2813.34,2555 h40 r90
  text "SDA" at 930,2460 h40
  text "3V3" at 1585,1060 h40
  text "GND" at 1795,1060 h40
  text "SPI_SCK" at 2323.34,970 h40 r90
  text "SPI_MISO" at 2423.34,970 h40 r90
  text "SPI_MOSI" at 2523.34,970 h40 r90
  text "3V3" at 2230,965 h40 r90
  text "TIM3_CH3" at 2628.34,965 h40 r90
  text "GND" at 2730,965 h40 r90
  text "NRST" at 2130,960 h40 r90
  text "STM32L496RG" at 2795,915 h60
  text "Test Board" at 2825,820 h60
Bottom Overlay:
  drawing of 108 lines, arcs and shapes, not listed
Mechanical 1:
  the board outline again, w10

## Text inside footprints (layer, text, board x,y; h text height)
J1: Mechanical 4 "1" at 1596.3,765.67 h73.82; Mechanical 4 "1" at 1596.3,765.67 h73.82
J3: Mechanical 4 "1" at 3213.7,2724.33 h73.82 r180; Mechanical 4 "1" at 3213.7,2724.33 h73.82 r180